# EAGLE board trashotron-neuron-quad-v1 (EAGLE 9.6.2)
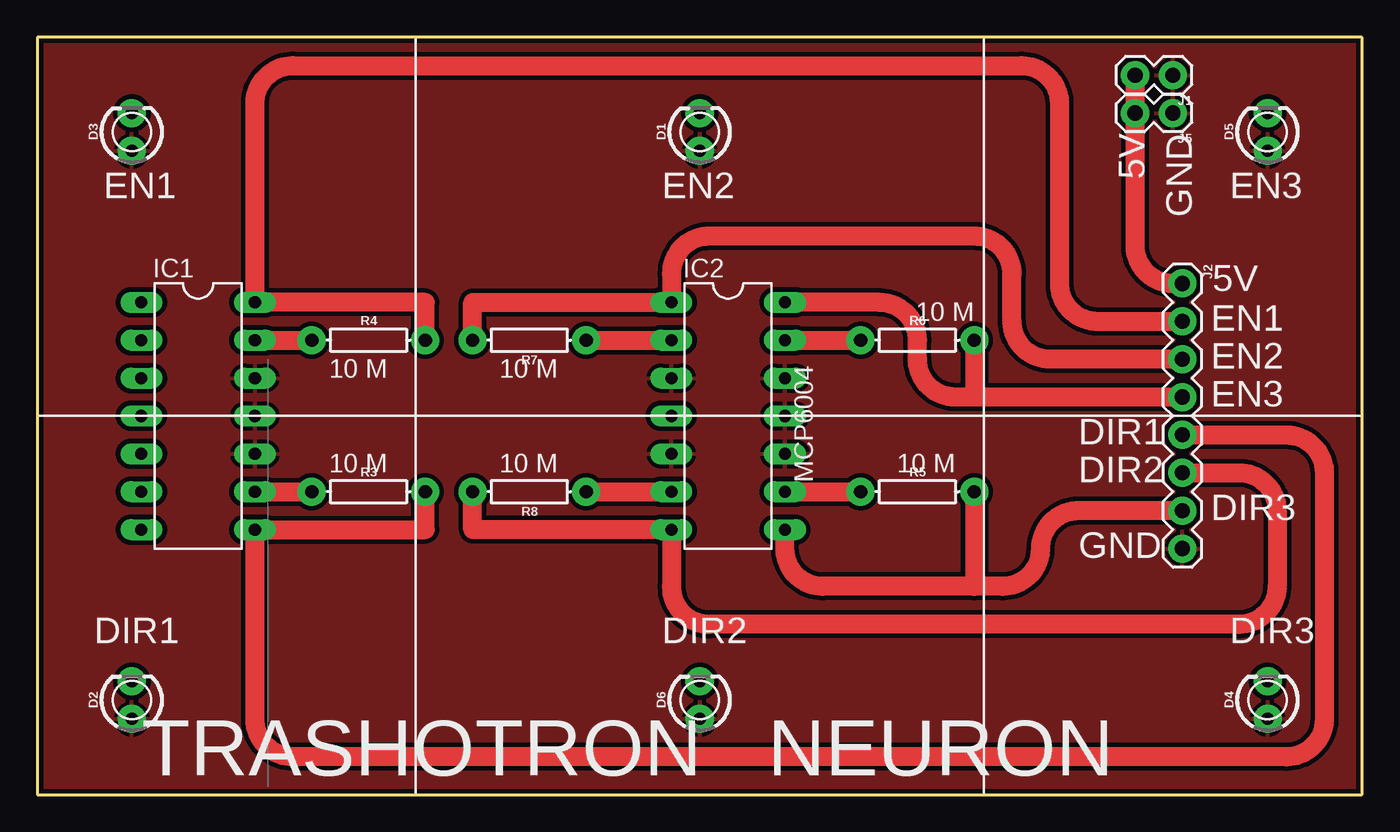
[diagram p0: board, top side]
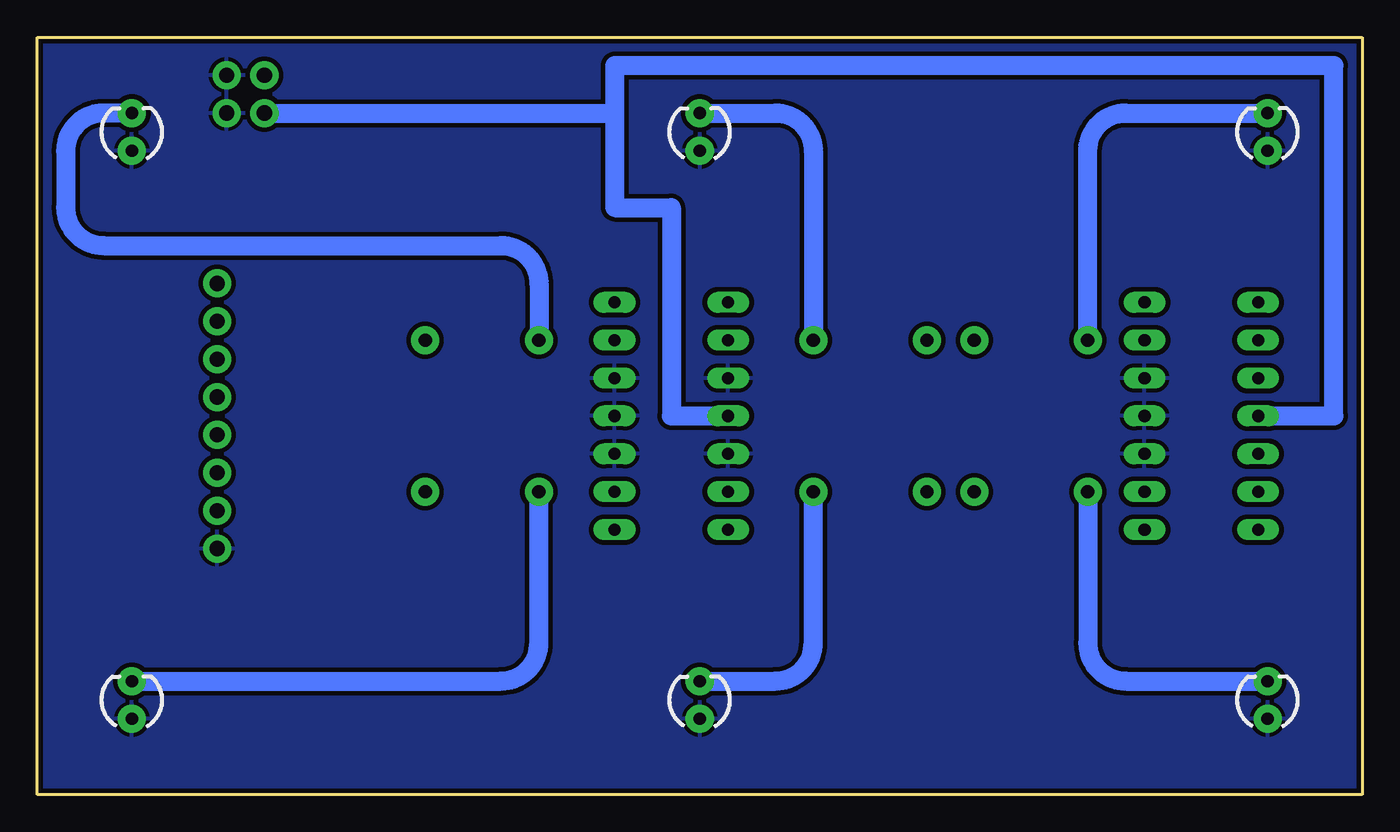
[diagram p1: board, bottom side, seen from below]

Size 88.9 x 50.8 mm. Coordinates in mm from the lower left corner, seen from the top.
Outline: 0,50.8 0,0 88.9,0 88.9,50.8 0,50.8
Copper layers (1*16): Top 0.035mm / dielectric 1.5mm / Bottom 0.035mm
Design rules "default": minimum track width 8mil, minimum drill 20mil, track to track 8mil, track to pad 8mil, pad to pad 8mil, via to via 8mil, smd to smd 8mil, copper to edge 10mil, drill to drill 8mil, minimum pad ring 12mil, minimum via ring 10mil, stop-mask expansion 4mil, vias tented up to drill 25mil, thermal gap 10mil
Net classes: 0 default: width 0.203 mm; 1 vcc: width 0.254 mm

## Footprints (pad centres in the part's own frame; a part is rotated, then mirrored left to right if it is on the bottom)
LED_3MM = drill 0.813 pad 1.88: A -1.27,0; K 1.27,0
DIL14 = drill 0.813 long: 1 -7.62,-3.81; 2 -5.08,-3.81; 3 -2.54,-3.81; 4 0,-3.81; 5 2.54,-3.81; 6 5.08,-3.81; 7 7.62,-3.81; 8 7.62,3.81; 9 5.08,3.81; 10 2.54,3.81; 11 0,3.81; 12 -2.54,3.81; 13 -5.08,3.81; 14 -7.62,3.81
1X02 = drill 1.016 pad 1.88: 1 0,0; 2 2.54,0
1X08 = drill 1.016 pad 1.88: 1 0,0; 2 2.54,0; 3 5.08,0; 4 7.62,0; 5 10.16,0; 6 12.7,0; 7 15.24,0; 8 17.78,0
AXIAL-0.3 = drill 0.9 pad 1.88: P$1 -3.81,0; P$2 3.81,0

## Placement (x,y rotation side)
D1  [LED_3MM]  44.45,44.45 90 top
D2  [LED_3MM]  6.35,6.35 90 top
D3  [LED_3MM]  6.35,44.45 90 top
D4  [LED_3MM]  82.55,6.35 90 top
D5  [LED_3MM]  82.55,44.45 90 top
D6  [LED_3MM]  44.45,6.35 90 top
IC1  MCP604P  [DIL14]  10.79,25.4 270 top
IC2  MCP604P  [DIL14]  46.35,25.4 270 top
J1  [1X02]  76.2,48.26 180 top
J2  [1X08]  76.83,34.29 270 top
J5  [1X02]  76.2,45.72 180 top
R3  [AXIAL-0.3]  22.23,20.32 0 top
R4  [AXIAL-0.3]  22.23,30.48 0 top
R5  [AXIAL-0.3]  59.05,20.32 0 top
R6  [AXIAL-0.3]  59.05,30.48 0 top
R7  [AXIAL-0.3]  33.02,30.48 180 top
R8  [AXIAL-0.3]  33.02,20.32 180 top

## Library data of the parts
D1-D6 = SparkFun-LED; PROD_ID: DIO-08794
IC1 IC2 = linear
J1 J5 = SparkFun-Connectors
J2 = SparkFun-Connectors; PROD_ID: CONN-08438
R3-R8 = SparkFun-Resistors

## Nets
DIR1: IC1.8 J2.5 R3.P$2
DIR2: IC2.7 J2.6 R8.P$2
DIR3: IC2.8 J2.7 R5.P$2
EN1: IC1.14 J2.2 R4.P$2
EN2: IC2.1 J2.3 R7.P$2
EN3: IC2.14 J2.4 R6.P$2
GND: D1.A D2.A D3.A D4.A D5.A D6.A IC1.10 IC1.11 IC1.12 IC2.3 IC2.5 IC2.10 IC2.11 IC2.12 J1.1 J2.8 J5.1
N$1: D1.K IC2.2 R7.P$1
N$4: IC1.1
N$5: IC1.7
N$7: D2.K IC1.9 R3.P$1
N$8: D6.K IC2.6 R8.P$1
N$9: D4.K IC2.9 R5.P$1
N$11: D5.K IC2.13 R6.P$1
N$13: D3.K IC1.13 R4.P$1
VCC: IC1.4 IC2.4 J1.2 J2.1 J5.2

## Tracks (layer width: path | path; a pad name or v marks a point on that pad's centre or on a via)
DIR1
  Top 1.27: J2.5 83.82,24.13 arc-90 86.36,21.59 86.36,5.08 arc-90 83.82,2.54 17.14,2.54 arc-90 14.61,5.08 IC1.8 26.04,17.78 R3.P$2
DIR2
  Top 1.27: J2.6 80.64,21.59 arc-90 83.19,19.05 83.19,13.97 arc-90 80.64,11.43 45.09,11.43 arc-90 42.55,13.97 IC2.7 29.21,17.78 R8.P$2
DIR3
  Top 1.27: J2.7 69.85,19.05 arc90 67.31,16.51 arc-90 64.77,13.97 62.87,13.97 | IC2.8 50.16,16.51 arc90 52.7,13.97 62.87,13.97 | R5.P$2 62.87,13.97
EN1
  Top 1.27: J2.2 71.12,31.75 arc-90 68.58,34.29 68.58,46.35 arc90 66.04,48.9 17.14,48.9 arc90 14.61,46.35 IC1.14 26.04,33.02 R4.P$2
EN2
  Top 1.27: J2.3 67.94,29.21 arc-90 65.41,31.75 65.41,34.92 arc90 62.87,37.47 45.09,37.47 arc90 42.55,34.92 IC2.1 29.21,33.02 R7.P$2
EN3
  Top 1.27: J2.4 62.87,26.67 | 62.87,26.67 61.59,26.67 arc-90 59.05,29.21 59.05,30.48 arc90 56.52,33.02 IC2.14 | R6.P$2 62.87,26.67
GND
  pour Top (isolate 0.305): 0,50.8 88.9,50.8 88.9,0 0,0
  pour Bottom (isolate 0.305): 0,50.8 88.9,50.8 88.9,0 0,0
N$1
  Top 1.27: R7.P$1 IC2.2
  Bottom 1.27: D1.K 39.37,45.72 arc90 36.83,43.18 R7.P$1
N$7
  Top 1.27: IC1.9 R3.P$1
  Bottom 1.27: R3.P$1 18.41,10.16 arc-90 15.88,7.62 D2.K
N$8
  Top 1.27: R8.P$1 IC2.6
  Bottom 1.27: D6.K 39.37,7.62 arc-90 36.83,10.16 R8.P$1
N$9
  Top 1.27: IC2.9 R5.P$1
  Bottom 1.27: D4.K 57.78,7.62 arc-90 55.24,10.16 R5.P$1
N$11
  Top 1.27: IC2.13 R6.P$1
  Bottom 1.27: D5.K 84.45,45.72 arc-90 87,43.18 87,39.37 arc-90 84.45,36.83 57.78,36.83 arc90 55.24,34.29 R6.P$1
N$13
  Top 1.27: IC1.13 R4.P$1
  Bottom 1.27: R4.P$1 18.41,43.18 arc90 15.88,45.72 D3.K
VCC
  Top 1.27: J2.1 76.2,34.29 arc-90 73.66,36.83 J5.2 J1.2
  Bottom 1.27: J5.2 50.16,45.72 | IC2.4 46.35,25.4 46.35,39.37 50.16,39.37 50.16,45.72 | IC1.4 1.91,25.4 1.91,48.9 50.16,48.9 50.16,45.72

## Text on the board
tPlace: 5V | EN1 | EN2 | EN3 | GND | 5V | 10 M | EN1 | 10 M | 10 M | EN2 | EN3 | 10 M | 10 M | 10 M | DIR1 | MCP6004 | DIR2 | DIR3 | GND | DIR1 | DIR2 | DIR3 | TRASHOTRON NEURON
tValues: Tent Vias! | Arduino Wee v1.3